# Altium PCB PCB1.PcbDoc
Units mil, origin at the board's own origin, x right, y up, seen from the top; angles counter-clockwise.
Board outline 10614.63 x 650 mil, 2 copper layers (Top Layer, Bottom Layer); 27 components, 29 nets, 217 pads, 0 vias.
Unrouted connection lines stored in the file: 66.
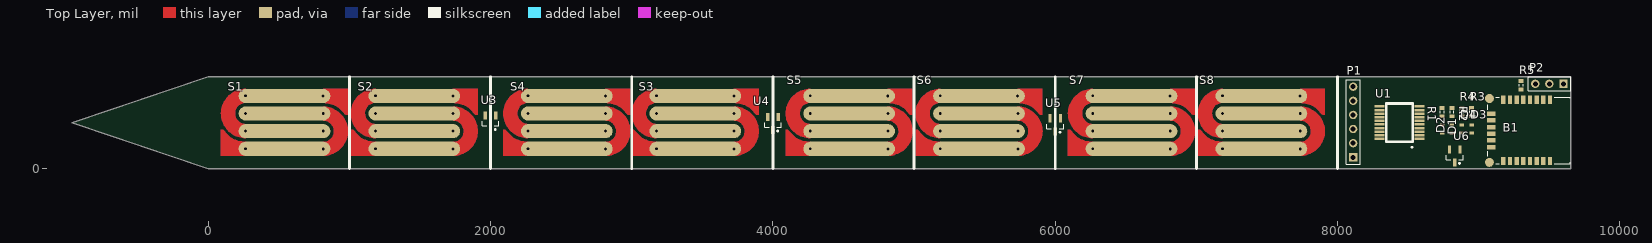
[diagram p0: Top Layer view]
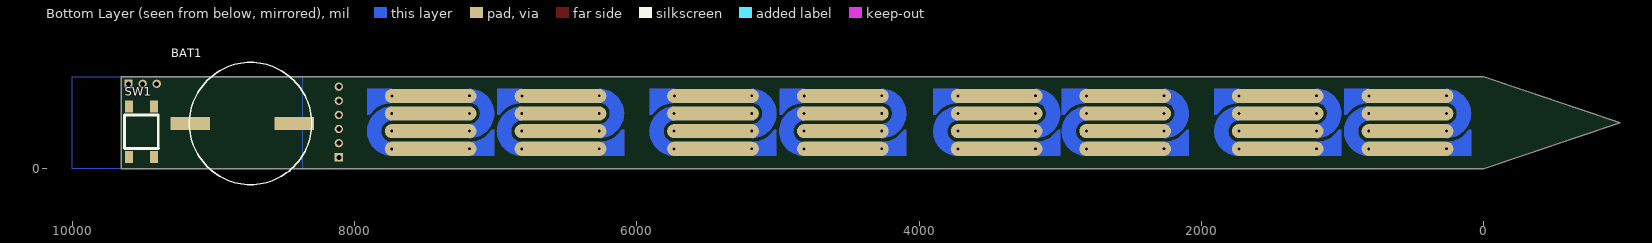
[diagram p1: Bottom Layer view, seen from below]

## Layer stack, top to bottom
Top Solder: solder mask 0.4, Solder Resist, Dk 3.5
Top Layer: signal copper 1.4
Dielectric 1: dielectric 12.6, FR-4, Dk 4.8
Bottom Layer: signal copper 1.4
Bottom Solder: solder mask 0.4, Solder Resist, Dk 3.5

## Board outline
9650,0 0,0 -964.62,325 0,650 9650,650

## Design rules (kind name [scope] priority, off if disabled: settings)
Clearance [All] p1: gap=10
PolygonConnect [All] p1: connectstyle=Relief reliefconductorwidth=10 reliefentries=4 polygonreliefangle="90 Angle" airgapwidth=10
RoutingVias [All] p1: holewidth=28 width=50 viastyle="Through Hole" minholewidth=28 minwidth=50 maxholewidth=28 maxwidth=50
SolderMaskExpansion [All] p1: expansion=4
Width [All] p1: maxlimit=10 minlimit=10 preferedwidth=10
30 further rules are at their usual default settings.

## Components (designator, comment, footprint, x,y, rotation, side; value= is the part's Value field where it differs from the comment)
B1 "RN4020" "RN4020 MODULE-24" 9290,270 r270 top
BAT1 "2032 Coin Cell" 1063TR-COINCELL 8770,320 r270 bottom
D1 "LED" 603_ 8740,280 r0 top
D2 "LED" 603_ 8810,280 r0 top
D3 "LED" 603_ 8950,280 r180 top
D4 "LED" 603_ 8880,280 r0 top
P1 "Header 6" HDR1X6 8110,80 r90 top
P2 "Serial" HDR1X3 9600,600 r180 top
R1 "Res3" J1-0603 8740,400 r270 top
R2 "Res3" J1-0603 8810,400 r270 top
R3 "Res3" J1-0603 8950,400 r270 top
R4 "Res3" J1-0603 8880,400 r270 top
R5 "Res3" J1-0603 9300,590 r270 top
S1 "MoistureSensor" MOISTURE_2 90,90 r0 top
S2 "MoistureSensor" MOISTURE_2 1010,90 r0 top
S3 "MoistureSensor" MOISTURE_2 3000.19,90 r0 top
S4 "MoistureSensor" MOISTURE_2 2090,90 r0 top
S5 "MoistureSensor" MOISTURE_2 4090,90 r0 top
S6 "MoistureSensor" MOISTURE_2 5010,90 r0 top
S7 "MoistureSensor" MOISTURE_2 6090,90 r0 top
S8 "MoistureSensor" MOISTURE_2 7010,90 r0 top
SW1 "PUSHBUTTON" PUSHBUTTON 9597.16,440 r180 bottom
U1 "PIC16LF1559" SSOP-20 8580,210 r180 top
U3 "MCP9700" SOT23_M 2000,330 r270 top
U4 "MCP9700" SOT23_M 4000,320 r270 top
U5 "MCP9700" SOT23_M 6000,310 r270 top
U6 "MCP9700" SOT23_M 8830,90 r270 top

## Footprints (in the part's own frame and the unit in brackets; to place one, negate y for a bottom-side part, rotate by r counter-clockwise, add the part's x,y. Pads: shape width x height; smd on the part's side, far side on the other; paste and mask are expansions set on the pad)
603_ [mm]
  rect 0.8x0.6 smd: 1(0,-0.725) 2(0,0.725)
1063TR-COINCELL [mm]
  rect 2.36x7.1 smd: 1(0,-10) 2(0,8.7)
  silkscreen extent -10.97,-10.12 11.02,11.87
HDR1X3 [mm] "Connector; Header; 3 Position"
  rect 1.5x1.5 hole 0.9: 1(0,0)
  round 1.5 hole 0.9: 2(2.54,0) 3(5.08,0)
  silkscreen extent -1.27,-1.27 6.35,1.27
HDR1X6 [mm] "Connector; Header; 6 Position"
  rect 1.5x1.5 hole 0.9: 1(0,0)
  round 1.5 hole 0.9: 2(2.54,0) 3(5.08,0) 4(7.62,0) 5(10.16,0) 6(12.7,0)
  silkscreen extent -1.27,-1.27 13.97,1.27
J1-0603 [mm] "Chip Resistor, Body 1.6x0.8mm, IPC High Density"
  rect 0.7x0.9 smd: 1(-0.75,0) 2(0.75,0)
  silkscreen extent -0.2,-0.35 0.2,0.35, body extent -0.85,-0.48 0.85,0.48, height 0.9
MOISTURE_2 [mil]
  round 30 hole 20: 0(175,175.13) 0(175.01,425.36) 0(723.64,424.77) 0(725,175) 1(175,300) 1(175,49.88) 1(725,49.64) 1(725,299.87)
  oval 650x100 smd paste-1000: 0(449.93,424.51) 0(450,175) 1(450,50) 1(450,300)
  oval 650x100 smd far side paste-1000: 0(449.93,424.51) 0(450,175) 1(450,50) 1(450,300)
  Top Layer region: 175,100 91.86,118.66 26.27,173.04 26.27,173.04 15.67,184.64 0,184.64 0,175 0,0 175,0
  Top Layer region: 725,349.75 812.05,325.67 875.92,261.8 900,174.75 900,174.75 875.92,87.7 812.05,23.83 725,-0.25 725,-0.25 725,99.75 753.95,105.02 778.51,121.24 794.73,145.79 800,174.75 800,174.75 789.46,211.9 762.15,239.21 725,249.75 725,249.75
  Top Layer region: 175,125.25 87.95,149.33 24.08,213.2 0,300.25 0,300.25 24.08,387.3 87.95,451.17 175,475.25 175,475.25 175,375.25 146.05,369.98 121.49,353.76 105.27,329.21 100,300.25 100,300.25 110.54,263.1 137.85,235.79 175,225.25 175,225.25
  Top Layer region: 723.64,374.66 809.98,354.39 876.55,295.78 876.56,295.78 882.97,290.02 898.64,290.02 898.64,299.66 898.64,474.66 723.64,474.66
  Bottom Layer region: 175,100 91.86,118.66 26.27,173.04 26.27,173.04 15.67,184.64 0,184.64 0,175 0,0 175,0
  Bottom Layer region: 725,349.75 812.05,325.67 875.92,261.8 900,174.75 900,174.75 875.92,87.7 812.05,23.83 725,-0.25 725,-0.25 725,99.75 753.95,105.02 778.51,121.24 794.73,145.79 800,174.75 800,174.75 789.46,211.9 762.15,239.21 725,249.75 725,249.75
  Bottom Layer region: 175,125.25 87.95,149.33 24.08,213.2 0,300.25 0,300.25 24.08,387.3 87.95,451.17 175,475.25 175,475.25 175,375.25 146.05,369.98 121.49,353.76 105.27,329.21 100,300.25 100,300.25 110.54,263.1 137.85,235.79 175,225.25 175,225.25
  Bottom Layer region: 723.64,374.66 809.98,354.39 876.56,295.78 876.56,295.78 882.97,290.02 898.64,290.02 898.64,299.66 898.64,474.66 723.64,474.66
PUSHBUTTON [mm] "TE 5-1437565-0"
  rect 1.4x2.1 smd: 1(4.5,-9.1) 1(4.5,0) 2(0,-9.1) 2(0,0)
  silkscreen extent -0.8,-7.57 5.3,-1.55
"RN4020 MODULE-24" [mm]
  rect 1.5x0.8 smd: 1(-5.5,5.45) 2(-5.5,4.25) 3(-5.5,3.05) 4(-5.5,1.85) 5(-5.5,0.65) 6(-5.5,-0.55) 7(-5.5,-1.75) 8(-5.5,-2.95) 17(5.5,-2.95) 18(5.5,-1.75) 19(5.5,-0.55) 20(5.5,0.65) 21(5.5,1.85) 22(5.5,3.05) 23(5.5,4.25) 24(5.5,5.45)
  round 1.6 smd: 9(-5.75,-5.45) 16(5.75,-5.45)
  rect 0.8x1.5 smd: 10(-3,-5.15) 11(-1.8,-5.15) 12(-0.6,-5.15) 13(0.6,-5.15) 14(1.8,-5.15) 15(3,-5.15)
  silkscreen extent -6,-5.75 6,9.1, body extent -5.75,-5.45 5.75,14.05, height 2.3
SOT23_M [mm] "SOT23, 3-Leads, Body 2.9x1.3mm, Pitch 0.95mm, Lead Span 2.3mm - Reverse Pinning, IPC Low Density"
  rect 1.45x0.6 smd: 1(1.175,0) 2(-1.175,-0.95) 3(-1.175,0.95)
  silkscreen extent -0.1,-1.5 1.47,1.5, body extent -0.7,-1.5 0.7,1.5, height 1.1
SSOP-20 [mm]
  rect 1.75x0.45 smd: 1(0,0) 2(0,-0.65) 3(0,-1.3) 4(0,-1.95) 5(0,-2.6) 6(0,-3.25) 7(0,-3.9) 8(0,-4.55) 9(0,-5.2) 10(0,-5.85) 11(7.2,-5.85) 12(7.2,-5.2) 13(7.2,-4.55) 14(7.2,-3.9) 15(7.2,-3.25) 16(7.2,-2.6) 17(7.2,-1.95) 18(7.2,-1.3) 19(7.2,-0.65) 20(7.2,0)
  silkscreen extent 1.2,-6.35 5.98,1.63

## Part data
P1: "Header, 6-Pin"
P2: library part "Header 3", "Header, 3-Pin"
R1 R2 R3 R4 R5: "Resistor"
SW1: "TE 5-1437565-0"

## Nets (pads, with @x,y where several pads share a name; then routed paths per layer and width w, separated by ;. In a path a pad name is that pad's centre, name@x,y a point inside that pad or via, vN(x,y) a via of type N, cw(c..) or ccw(c..) an arc to the next point about the centre after c; other vN are vias at no path point)
CONNECT: B1.10 R3.1
CTS: B1.14 U1.11
GND: B1.1 B1.9 B1.16 B1.24 BAT1.2 P1.3 P2.3 R5.1 S1.0 S2.0 S3.0 S4.0 S5.0 S6.0 S7.0 S8.0 U1.20 U3.3 U4.3 U5.3 U6.3
LED1: R1.1 U1.8
LED2: R2.1 U1.9
M1: S1.1 S2.1 U1.16
M2: S3.1 S4.1 U1.15
M3: S5.1 S6.1 U1.14
M4: S7.1 S8.1 U1.7
MLDP: B1.8
MLDP_EV: B1.11 R4.1
NetD1_2: D1.2 R1.2
NetD2_2: D2.2 R2.2
NetD3_2: D3.2 R3.2
NetD4_2: D4.2 R4.2
NetP1_1: P1.1 U1.4
NetP1_4: P1.4 U1.19
NetP1_5: P1.5 U1.18
NetR5_2: R5.2 SW1.1 U1.17
RTS: B1.18 U1.13
RX: B1.6 P2.2 U1.12
TEMP1: B1.4 U3.2
TEMP2: U1.2 U4.2
TEMP3: B1.3 U5.2
TEMP4: U1.3 U6.2
TX: B1.5 P2.1 U1.10
VCC: B1.23 BAT1.1 D1.1 D2.1 D3.1 D4.1 P1.2 SW1.2 U1.1 U3.1 U4.1 U5.1 U6.1
WAKE_HW: B1.15 U1.5
WAKE_SW: B1.7 U1.6
pads on no net: B1.2 B1.12 B1.13 B1.17 B1.19 B1.20 B1.21 B1.22 P1.6

## Polygon pours and split planes (outlines as drawn)
GND on Bottom Layer "Multi-Layer-No Net" (solid, shelved, pour order 4): 8370,650 8370,0 10000,0 10000,650

## Silkscreen, mask and mechanical layers (free items; w line width, h text height)
Top Overlay:
  lines w20: 1000,0 1000,650 ; 2000,0 2000,650 ; 3000.19,0 3000.19,650 ; 4000,0 4000,650 ; 5000,0 5000,650 ; 6000,0 6000,650 ; 7000,0 7000,650 ; 8000,0 8000,650